# EAGLE board CT_schematic (EAGLE 7.6.0)

Size 100 x 80 mm. Coordinates in mm from the lower left corner, seen from the top.
Outline: 0,0 100,0 100,80 0,80 0,0
Copper layers (1*16): Top 0.035mm / dielectric 1.5mm / Bottom 0.035mm
Design rules "default": minimum track width 10mil, minimum drill 24mil, track to track 8mil, track to pad 8mil, pad to pad 8mil, via to via 8mil, smd to smd 8mil, copper to edge 40mil, drill to drill 8mil, minimum pad ring 10mil, minimum via ring 8mil, stop-mask expansion 4mil, vias tented up to drill 0mil, thermal gap 10mil

## Footprints (pad centres in the part's own frame; a part is rotated, then mirrored left to right if it is on the bottom)
C0603 = smd 0.8 x 0.8: 1 -0.762,0; 2 0.762,0
C0402 = smd 0.5 x 0.5: 1 -0.508,0; 2 0.508,0
C0805 = smd 1.2 x 1.3: 1 -1.016,0; 2 1.016,0
C1210 = smd 1.2 x 2.5: 1 -1.524,0; 2 1.524,0
EXV-9H = smd 3.505 x 1.676: 1 -2.857,0; 2 2.857,0
L0603 = smd 0.8 x 0.8: 1 -0.762,0; 2 0.762,0
IND_PM3316 = smd 2.921 x 2.794: 1 -5.144,0; 2 5.144,0
PJ-037B_PACKAGE = drill 3.7 square: 1 12,0 | drill 3.2 square: 2 6,0
R0603 = smd 0.8 x 0.8: 1 -0.762,0; 2 0.762,0
LQFP176 = smd 0.3 x 1.2: 1 -10.75,-12.75; 2 -10.25,-12.75; 3 -9.75,-12.75; 4 -9.25,-12.75; 5 -8.75,-12.75; 6 -8.25,-12.75; 7 -7.75,-12.75; 8 -7.25,-12.75; 9 -6.75,-12.75; 10 -6.25,-12.75; 11 -5.75,-12.75; 12 -5.25,-12.75; 13 -4.75,-12.75; 14 -4.25,-12.75; 15 -3.75,-12.75; 16 -3.25,-12.75; 17 -2.75,-12.75; 18 -2.25,-12.75; 19 -1.75,-12.75; 20 -1.25,-12.75; 21 -0.75,-12.75; 22 -0.25,-12.75; 23 0.25,-12.75; 24 0.75,-12.75; 25 1.25,-12.75; 26 1.75,-12.75; 27 2.25,-12.75; 28 2.75,-12.75; 29 3.25,-12.75; 30 3.75,-12.75; 31 4.25,-12.75; 32 4.75,-12.75; 33 5.25,-12.75; 34 5.75,-12.75; 35 6.25,-12.75; 36 6.75,-12.75; 37 7.25,-12.75; 38 7.75,-12.75; 39 8.25,-12.75; 40 8.75,-12.75; 41 9.25,-12.75; 42 9.75,-12.75; 43 10.25,-12.75; 44 10.75,-12.75; 89 10.75,12.75; 90 10.25,12.75; 91 9.75,12.75; 92 9.25,12.75; 93 8.75,12.75; 94 8.25,12.75; 95 7.75,12.75; 96 7.25,12.75; 97 6.75,12.75; 98 6.25,12.75; 99 5.75,12.75; 100 5.25,12.75; 101 4.75,12.75; 102 4.25,12.75; 103 3.75,12.75; 104 3.25,12.75; 105 2.75,12.75; 106 2.25,12.75; 107 1.75,12.75; 108 1.25,12.75; 109 0.75,12.75; 110 0.25,12.75; 111 -0.25,12.75; 112 -0.75,12.75; 113 -1.25,12.75; 114 -1.75,12.75; 115 -2.25,12.75; 116 -2.75,12.75; 117 -3.25,12.75; 118 -3.75,12.75; 119 -4.25,12.75; 120 -4.75,12.75; 121 -5.25,12.75; 122 -5.75,12.75; 123 -6.25,12.75; 124 -6.75,12.75; 125 -7.25,12.75; 126 -7.75,12.75; 127 -8.25,12.75; 128 -8.75,12.75; 129 -9.25,12.75; 130 -9.75,12.75; 131 -10.25,12.75; 132 -10.75,12.75 | smd 1.2 x 0.3: 45 12.75,-10.75; 46 12.75,-10.25; 47 12.75,-9.75; 48 12.75,-9.25; 49 12.75,-8.75; 50 12.75,-8.25; 51 12.75,-7.75; 52 12.75,-7.25; 53 12.75,-6.75; 54 12.75,-6.25; 55 12.75,-5.75; 56 12.75,-5.25; 57 12.75,-4.75; 58 12.75,-4.25; 59 12.75,-3.75; 60 12.75,-3.25; 61 12.75,-2.75; 62 12.75,-2.25; 63 12.75,-1.75; 64 12.75,-1.25; 65 12.75,-0.75; 66 12.75,-0.25; 67 12.75,0.25; 68 12.75,0.75; 69 12.75,1.25; 70 12.75,1.75; 71 12.75,2.25; 72 12.75,2.75; 73 12.75,3.25; 74 12.75,3.75; 75 12.75,4.25; 76 12.75,4.75; 77 12.75,5.25; 78 12.75,5.75; 79 12.75,6.25; 80 12.75,6.75; 81 12.75,7.25; 82 12.75,7.75; 83 12.75,8.25; 84 12.75,8.75; 85 12.75,9.25; 86 12.75,9.75; 87 12.75,10.25; 88 12.75,10.75; 133 -12.75,10.75; 134 -12.75,10.25; 135 -12.75,9.75; 136 -12.75,9.25; 137 -12.75,8.75; 138 -12.75,8.25; 139 -12.75,7.75; 140 -12.75,7.25; 141 -12.75,6.75; 142 -12.75,6.25; 143 -12.75,5.75; 144 -12.75,5.25; 145 -12.75,4.75; 146 -12.75,4.25; 147 -12.75,3.75; 148 -12.75,3.25; 149 -12.75,2.75; 150 -12.75,2.25; 151 -12.75,1.75; 152 -12.75,1.25; 153 -12.75,0.75; 154 -12.75,0.25; 155 -12.75,-0.25; 156 -12.75,-0.75; 157 -12.75,-1.25; 158 -12.75,-1.75; 159 -12.75,-2.25; 160 -12.75,-2.75; 161 -12.75,-3.25; 162 -12.75,-3.75; 163 -12.75,-4.25; 164 -12.75,-4.75; 165 -12.75,-5.25; 166 -12.75,-5.75; 167 -12.75,-6.25; 168 -12.75,-6.75; 169 -12.75,-7.25; 170 -12.75,-7.75; 171 -12.75,-8.25; 172 -12.75,-8.75; 173 -12.75,-9.25; 174 -12.75,-9.75; 175 -12.75,-10.25; 176 -12.75,-10.75
SOIC-8 = smd 1.6 x 0.6: 1 -2.7,1.905 | smd 1.55 x 0.6: 2 -2.7,0.635; 3 -2.7,-0.635; 4 -2.7,-1.905; 5 2.7,-1.905; 6 2.7,-0.635; 7 2.7,0.635; 8 2.7,1.905
WSON-6 = smd 0.4 x 0.6: 1 -1,-1.4; 2 0,-1.4; 3 1,-1.4; 4 1,1.4; 5 0,1.4; 6 -1,1.4 | drill 0.2 pad 0.3: P$1 0.95,0; P$2 -0.95,0; P$3 0,-0.5; P$4 0,0.5 | smd 2.4 x 1.5: PAD 0,0
TST-110-05-T-D-RA = drill 1 pad 1.7 square: 1 0,0 | drill 1 pad 1.7: 2 0,2.54; 3 2.54,0; 4 2.54,2.54; 5 5.08,0; 6 5.08,2.54; 7 7.62,0; 8 7.62,2.54; 9 10.16,0; 10 10.16,2.54; 11 12.7,0; 12 12.7,2.54; 13 15.24,0; 14 15.24,2.54; 15 17.78,0; 16 17.78,2.54; 17 20.32,0; 18 20.32,2.54; 19 22.86,0; 20 22.86,2.54
TH58NVG3S0HBAI4 = smd 0.46 x 0.46: A1 -5.6,2.4; A2 -5.6,1.6; A9 -5.6,-5.6; A10 -5.6,-6.4; B1 -4.8,2.4; B9 -4.8,-5.6; B10 -4.8,-6.4; C3 -4,0.8; C4 -3.2,0.8; C5 -2.4,0.8; C6 -1.6,0.8; C7 -0.8,0.8; C8 0,0.8; D3 -4,0; D4 -3.2,0; D5 -2.4,0; D6 -1.6,0; D7 -0.8,0; D8 0,0; E3 -4,-0.8; E4 -3.2,-0.8; E5 -2.4,-0.8; E6 -1.6,-0.8; E7 -0.8,-0.8; E8 0,-0.8; F3 -4,-1.6; F4 -3.2,-1.6; F5 -2.4,-1.6; F6 -1.6,-1.6; F7 -0.8,-1.6; F8 0,-1.6; G3 -4,-2.4; G4 -3.2,-2.4; G5 -2.4,-2.4; G6 -1.6,-2.4; G7 -0.8,-2.4; G8 0,-2.4; H3 -4,-3.2; H4 -3.2,-3.2; H5 -2.4,-3.2; H6 -1.6,-3.2; H7 -0.8,-3.2; H8 0,-3.2; J3 -4,-4; J4 -3.2,-4; J5 -2.4,-4; J6 -1.6,-4; J7 -0.8,-4; J8 0,-4; K3 -4,-4.8; K4 -3.2,-4.8; K5 -2.4,-4.8; K6 -1.6,-4.8; K7 -0.8,-4.8; K8 0,-4.8; L1 0.8,2.4; L2 0.8,1.6; L9 0.8,-5.6; L10 0.8,-6.4; M1 1.6,2.4; M2 1.6,1.6; M9 1.6,-5.6; M10 1.6,-6.4
ABS07-32.768KHZ-7-T = smd 1.1 x 2.4: 1 -2.5,0; 2 0,0
ABLS-25.000MHZ-B2F-T = smd 5.6 x 2.8: 1 -3.81,0; 2 5.69,0
HTSSOP14 = smd 1.676 x 0.356: 1 -2.8,1.95; 2 -2.8,1.3; 3 -2.8,0.65; 4 -2.8,0; 5 -2.8,-0.65; 6 -2.8,-1.3; 7 -2.8,-1.95; 8 2.8,-1.95; 9 2.8,-1.3; 10 2.8,-0.65; 11 2.8,0; 12 2.8,0.65; 13 2.8,1.3; 14 2.8,1.95 | smd 3 x 5: 15 0,0 | drill 0.4 pad 0.45: P$1 -0.75,1.5; P$2 0.75,1.5; P$3 -0.75,0; P$4 0.8,0; P$5 -0.75,-1.5; P$6 0.9,-1.5
SON-6 = smd 0.55 x 0.3: 1 -0.355,0.5 | smd 0.52 x 0.3: 2 -0.37,0; 3 -0.37,-0.5; 4 0.37,-0.5; 5 0.37,0; 6 0.37,0.5
SW_4-1437565-2 = smd 1.4 x 2.1: 1 -2.23,4.55; 2 -2.23,-4.55; 3 2.23,4.55; 4 2.23,-4.55
LGM67K-G1J2-24-Z = smd 0.8 x 1.4: A -2,0; C 0,0
NC7SZ125M5X = smd 1.3 x 0.7: 1 -1.3,0.95; 2 -1.3,0; 3 -1.3,-0.95; 4 1.3,-0.95; 5 1.3,0.95
DUMMY_PACKAGE_191 = drill 0.3: 1 0,-1; 2 1.5,-1; 3 3,-1

## Placement (x,y rotation side)
C1  1e-06  [C0603]  -60.96,69.85 0 top  (outside the outline)
C2  1e-07  [C0603]  -64.77,69.85 0 top  (outside the outline)
C3  1e-07  [C0603]  -68.58,69.85 0 top  (outside the outline)
C4  1e-07  [C0603]  -72.39,69.85 0 top  (outside the outline)
C5  1e-07  [C0603]  -76.2,69.85 0 top  (outside the outline)
C6  1e-07  [C0603]  -15.24,74.93 0 top  (outside the outline)
C7  1e-07  [C0603]  -19.05,74.93 0 top  (outside the outline)
C8  1e-07  [C0603]  -22.86,74.93 0 top  (outside the outline)
C9  1e-07  [C0603]  -26.67,74.93 0 top  (outside the outline)
C10  1e-07  [C0603]  -30.48,74.93 0 top  (outside the outline)
C11  1e-07  [C0603]  -34.29,74.93 0 top  (outside the outline)
C12  1e-07  [C0603]  -38.1,74.93 0 top  (outside the outline)
C13  1e-07  [C0603]  -41.91,74.93 0 top  (outside the outline)
C14  1e-07  [C0603]  -45.72,74.93 0 top  (outside the outline)
C15  1e-07  [C0603]  -49.53,74.93 0 top  (outside the outline)
C16  1e-07  [C0603]  -53.34,74.93 0 top  (outside the outline)
C17  1e-07  [C0603]  -57.15,74.93 0 top  (outside the outline)
C18  4.7e-06  [C0603]  -49.53,69.85 0 top  (outside the outline)
C19  1e-08  [C0603]  -60.96,74.93 0 top  (outside the outline)
C20  1e-06  [C0603]  -64.77,74.93 0 top  (outside the outline)
C21  1e-07  [C0603]  -68.58,74.93 0 top  (outside the outline)
C22  2.2e-06  [C0603]  -53.34,69.85 0 top  (outside the outline)
C23  2.2e-06  [C0603]  -57.15,69.85 0 top  (outside the outline)
C24  1e-11  [C0402]  -39.37,80.01 0 top  (outside the outline)
C25  1e-11  [C0402]  -43.18,80.01 0 top  (outside the outline)
C26  1e-11  [C0402]  -46.99,80.01 0 top  (outside the outline)
C27  1e-11  [C0402]  -50.8,80.01 0 top  (outside the outline)
C28  1e-08  [C0402]  -54.61,80.01 0 top  (outside the outline)
C29  1e-08  [C0402]  -58.42,80.01 0 top  (outside the outline)
C30  1e-07  [C0402]  -62.23,80.01 0 top  (outside the outline)
C31  1e-07  [C0402]  -66.04,80.01 0 top  (outside the outline)
C32  1e-05  [C0805]  -53.34,58.42 0 top  (outside the outline)
C33  1e-07  [C0402]  -69.85,80.01 0 top  (outside the outline)
C34  1e-07  [C0402]  -73.66,80.01 0 top  (outside the outline)
C35  1e-06  [C0603]  -72.39,74.93 0 top  (outside the outline)
C36  3.3e-09  [C0402]  -35.56,80.01 0 top  (outside the outline)
C37  1e-07  [C0402]  -77.47,80.01 0 top  (outside the outline)
C38  2.2e-05  [C1210]  -16.51,59.69 0 top  (outside the outline)
C39  2.2e-05  [C1210]  -22.86,59.69 0 top  (outside the outline)
C40  1e-05  [C1210]  -29.21,59.69 0 top  (outside the outline)
C41  1e-05  [C1210]  -35.56,59.69 0 top  (outside the outline)
C42  1e-07  [C0402]  -15.24,85.09 0 top  (outside the outline)
C43  0.0001  [EXV-9H]  -60.96,44.45 0 top  (outside the outline)
C44  0.0001  [EXV-9H]  -72.39,44.45 0 top  (outside the outline)
C45  1e-08  [C0402]  -19.05,85.09 0 top  (outside the outline)
C46  1e-08  [C0402]  -22.86,85.09 0 top  (outside the outline)
F1  240.0  [L0603]  -76.2,74.93 0 top  (outside the outline)
I1  1e-05  [IND_PM3316]  -39.37,33.02 0 top  (outside the outline)
J1  PJ-037B  [PJ-037B_PACKAGE]  -72.39,7.62 0 top  (outside the outline)
R2  1000.0  [R0603]  -15.24,80.01 0 top  (outside the outline)
R7  4700.0  [R0603]  -19.05,80.01 0 top  (outside the outline)
R8  2200.0  [R0603]  -22.86,80.01 0 top  (outside the outline)
R10  2200.0  [R0603]  -26.67,80.01 0 top  (outside the outline)
R12  10000.0  [R0603]  -15.24,64.77 0 top  (outside the outline)
R13  10000.0  [R0603]  -20.32,64.77 0 top  (outside the outline)
R14  10000.0  [R0603]  -25.4,64.77 0 top  (outside the outline)
R15  10000.0  [R0603]  -30.48,64.77 0 top  (outside the outline)
R16  10000.0  [R0603]  -35.56,64.77 0 top  (outside the outline)
R17  10000.0  [R0603]  -40.64,64.77 0 top  (outside the outline)
R18  10000.0  [R0603]  -45.72,64.77 0 top  (outside the outline)
R19  10000.0  [R0603]  -50.8,64.77 0 top  (outside the outline)
R20  10000.0  [R0603]  -55.88,64.77 0 top  (outside the outline)
R21  10000.0  [R0603]  -60.96,64.77 0 top  (outside the outline)
R22  10000.0  [R0603]  -66.04,64.77 0 top  (outside the outline)
R23  10000.0  [R0603]  -71.12,64.77 0 top  (outside the outline)
R24  10000.0  [R0603]  -76.2,64.77 0 top  (outside the outline)
R25  10000.0  [R0603]  -15.24,69.85 0 top  (outside the outline)
R26  10000.0  [R0603]  -20.32,69.85 0 top  (outside the outline)
R27  10000.0  [R0603]  -25.4,69.85 0 top  (outside the outline)
R28  10000.0  [R0603]  -30.48,69.85 0 top  (outside the outline)
R29  71007.101651032  [R0603]  -62.23,58.42 0 top  (outside the outline)
R30  22000.0  [R0603]  -35.56,69.85 0 top  (outside the outline)
R31  10000.0  [R0603]  -40.64,69.85 0 top  (outside the outline)
R32  10000.0  [R0603]  -45.72,69.85 0 top  (outside the outline)
R33  9100.0  [R0603]  -30.48,80.01 0 top  (outside the outline)
R34  680000.0  [R0603]  -67.31,58.42 0 top  (outside the outline)
R35  120000.0  [R0603]  -72.39,58.42 0 top  (outside the outline)
U1  STM32F746IGT7  [LQFP176]  -26.67,13.97 0 top  (outside the outline)
U2  AT25640B-SSHL-T  [SOIC-8]  -58.42,33.02 0 top  (outside the outline)
U3  HDC1080DMBR  [WSON-6]  -52.07,44.45 0 top  (outside the outline)
U4  TST-110-05-T-D-RA  [TST-110-05-T-D-RA]  -46.99,41.91 0 top  (outside the outline)
U5  TH58NVG3S0HBAI4  [TH58NVG3S0HBAI4]  -50.8,10.16 0 top  (outside the outline)
U6  ABS07-32.768KHZ-7-T  [ABS07-32.768KHZ-7-T]  -49.53,52.07 0 top  (outside the outline)
U7  ABLS-25.000MHZ-B2F-T  [ABLS-25.000MHZ-B2F-T]  -26.67,52.07 0 top  (outside the outline)
U8  tps54225PWP  [HTSSOP14]  -58.42,52.07 0 top  (outside the outline)
U9  TPS3895ADRYR  [SON-6]  -31.75,83.82 0 top  (outside the outline)
U10  4-1437565-2  [SW_4-1437565-2]  -27.94,34.29 0 top  (outside the outline)
U11  Q65110A2395  [LGM67K-G1J2-24-Z]  -67.31,52.07 0 top  (outside the outline)
U12  nc7sz125m5x  [NC7SZ125M5X]  -40.64,58.42 0 top  (outside the outline)
U13  nc7sz125m5x  [NC7SZ125M5X]  -46.99,58.42 0 top  (outside the outline)
U14  Dummy  [DUMMY_PACKAGE_191]  -29.21,85.09 0 top  (outside the outline)

## Library data of the parts
C1-C46 F1 I1 J1 R2 R7 R8 R10 R12-R35 U1-U14 = circuit_tree

## Nets
CLK_CRYSTAL_U1_9: C24.1 U1.9 U6.1
CLK_CRYSTAL_U1_10: C25.1 U1.10 U6.2
CLK_CRYSTAL_U1_29: C26.1 U1.29 U7.1
CLK_CRYSTAL_U1_30: C27.1 U1.30 U7.2
GND: C1.2 C2.2 C3.2 C4.2 C5.2 C6.2 C7.2 C8.2 C9.2 C10.2 C11.2 C12.2 C13.2 C14.2 C15.2 C16.2 C17.2 C18.2 C19.2 C20.2 C21.2 C22.2 C23.2 C24.2 C25.2 C26.2 C27.2 C28.2 C29.2 C30.2 C31.2 C32.2 C33.2 C34.2 C35.2 C36.2 C38.2 C39.2 C40.2 C41.2 C42.2 C43.2 C44.2 C45.2 C46.2 J1.2 R2.2 R12.2 R14.2 R23.2 R30.2 R33.2 R35.2 U1.14 U1.22 U1.37 U1.61 U1.71 U1.90 U1.102 U1.113 U1.126 U1.135 U1.148 U1.158 U2.4 U3.2 U3.PAD U4.4 U4.6 U4.8 U4.10 U4.12 U4.14 U4.16 U4.18 U4.20 U5.C5 U5.K3 U5.K8 U8.5 U8.8 U8.9 U8.15 U9.2 U11.C U12.2 U12.3 U13.1 U13.3 U14.1
NET_U1_31: R7.1 U1.31 U13.4
NET_U1_39: C19.1 C20.1 F1.1 U1.38 U1.39
NET_U1_48: R14.1 U1.48
NET_U1_81: C22.1 U1.81
NET_U1_125: C23.1 U1.125
NET_U1_164: R8.1 U1.164 U3.6
NET_U1_165: R10.1 U1.165 U3.1
NET_U1_166: R12.1 U1.166
NET_U1_171: R13.1 U1.171
NET_U1_175: U11.A
NET_U1_176: U10.3 U10.4
NET_U2_3: R15.1 U2.3
NET_U2_7: R17.1 U2.7
NET_U4_19: R23.1 U4.19
NET_U5_C3: R27.1 U5.C3
NET_U8_2: R29.2 R30.1 U8.2
NET_U8_3: C35.1 U8.3
NET_U8_4: C36.1 U8.4
NET_U8_10: C37.1 I1.1 U8.10 U8.11
NET_U8_12: C37.2 U8.12
NET_U9_1: R32.1 R33.1 U9.1
NET_U9_3: R34.2 R35.1 U9.3
NET_U9_4: R31.1 U9.4 U12.4 U13.2
NET_U10_1: R2.1 U10.1 U10.2
PROC_FMC_A16: U1.99 U5.D5
PROC_FMC_A17: U1.100 U5.C4
PROC_FMC_D0: U1.104 U5.H4
PROC_FMC_D1: U1.105 U5.J4
PROC_FMC_D2: U1.142 U5.K4
PROC_FMC_D3: U1.143 U5.K5
PROC_FMC_D4: U1.68 U5.K6
PROC_FMC_D5: U1.69 U5.J7
PROC_FMC_D6: U1.70 U5.K7
PROC_FMC_D7: U1.73 U5.J8
PROC_FMC_INT: R28.1 U1.111 U5.C8
PROC_FMC_NCE: R24.1 U1.152 U5.C6
PROC_FMC_NOE: R25.1 U1.146 U5.D4
PROC_FMC_NWE: R26.1 U1.147 U5.C7
PROC_SPI1_MISO: U1.52 U2.2
PROC_SPI1_MOSI: U1.53 U2.5
PROC_SPI1_NSS: R16.1 U1.50 U2.1
PROC_SPI1_SCK: U1.51 U2.6
PROC_SYS_JTCK_SWCLK: R21.1 U1.137 U4.9
PROC_SYS_JTDI: R19.1 U1.138 U4.5
PROC_SYS_JTDO_SWO: U1.161 U4.13
PROC_SYS_JTMS_SWDIO: R20.1 U1.124 U4.7
PROC_SYS_JTRST: R18.1 U1.162 U4.3
PROC_TIM1_CH2: U1.74 U14.2
PROC_TIM1_CH4: U1.77 U14.3
RST_OUT_U4_SRESET_B: R22.1 U4.15 U12.1
VCC_S1_16V7: C40.1 C41.1 C43.1 C44.1 J1.1 U8.7 U8.13 U8.14
VCC_TIER1_3V3: C1.1 C2.1 C3.1 C4.1 C5.1 C6.1 C7.1 C8.1 C9.1 C10.1 C11.1 C12.1 C13.1 C14.1 C15.1 C16.1 C17.1 C18.1 C21.1 C28.1 C29.1 C30.1 C31.1 C32.1 C33.1 C34.1 C38.1 C39.1 C42.1 C45.1 C46.1 F1.2 I1.2 R7.2 R8.2 R10.2 R13.2 R15.2 R16.2 R17.2 R18.2 R19.2 R20.2 R21.2 R22.2 R24.2 R25.2 R26.2 R27.2 R28.2 R29.1 R31.2 R32.2 R34.1 U1.6 U1.15 U1.23 U1.36 U1.49 U1.62 U1.72 U1.82 U1.91 U1.103 U1.114 U1.127 U1.136 U1.149 U1.159 U1.172 U2.8 U3.5 U4.1 U4.2 U5.H8 U5.J6 U8.1 U9.6 U12.5 U13.5

## Tracks (layer width: path | path; a pad name or v marks a point on that pad's centre or on a via)
CLK_CRYSTAL_U1_9  (2 unrouted)
CLK_CRYSTAL_U1_10  (2 unrouted)
CLK_CRYSTAL_U1_29  (2 unrouted)
CLK_CRYSTAL_U1_30  (2 unrouted)
GND  (90 unrouted)
NET_U1_31  (2 unrouted)
NET_U1_39  (4 unrouted)
NET_U1_48  (1 unrouted)
NET_U1_81  (1 unrouted)
NET_U1_125  (1 unrouted)
NET_U1_164  (2 unrouted)
NET_U1_165  (2 unrouted)
NET_U1_166  (1 unrouted)
NET_U1_171  (1 unrouted)
NET_U1_176  (1 unrouted)
NET_U2_3  (1 unrouted)
NET_U2_7  (1 unrouted)
NET_U4_19  (1 unrouted)
NET_U5_C3  (1 unrouted)
NET_U8_2  (2 unrouted)
NET_U8_3  (1 unrouted)
NET_U8_4  (1 unrouted)
NET_U8_10  (3 unrouted)
NET_U8_12  (1 unrouted)
NET_U9_1  (2 unrouted)
NET_U9_3  (2 unrouted)
NET_U9_4  (3 unrouted)
NET_U10_1  (2 unrouted)
PROC_FMC_A16  (1 unrouted)
PROC_FMC_A17  (1 unrouted)
PROC_FMC_D0  (1 unrouted)
PROC_FMC_D1  (1 unrouted)
PROC_FMC_D2  (1 unrouted)
PROC_FMC_D3  (1 unrouted)
PROC_FMC_D4  (1 unrouted)
PROC_FMC_D5  (1 unrouted)
PROC_FMC_D6  (1 unrouted)
PROC_FMC_D7  (1 unrouted)
PROC_FMC_INT  (2 unrouted)
PROC_FMC_NCE  (2 unrouted)
PROC_FMC_NOE  (2 unrouted)
PROC_FMC_NWE  (2 unrouted)
PROC_SPI1_MISO  (1 unrouted)
PROC_SPI1_MOSI  (1 unrouted)
PROC_SPI1_NSS  (2 unrouted)
PROC_SPI1_SCK  (1 unrouted)
PROC_SYS_JTCK_SWCLK  (2 unrouted)
PROC_SYS_JTDI  (2 unrouted)
PROC_SYS_JTDO_SWO  (1 unrouted)
PROC_SYS_JTMS_SWDIO  (2 unrouted)
PROC_SYS_JTRST  (2 unrouted)
PROC_TIM1_CH2  (1 unrouted)
PROC_TIM1_CH4  (1 unrouted)
RST_OUT_U4_SRESET_B  (2 unrouted)
VCC_S1_16V7  (7 unrouted)
VCC_TIER1_3V3  (79 unrouted)